# Altium PCB Logic.PcbDoc
Units mil, origin at the board's own origin, x right, y up, seen from the top; angles counter-clockwise.
Board outline 1060 x 1560 mil, 2 copper layers (Top Layer, Bottom Layer); 8 components, 10 nets, 51 pads, 1 vias.
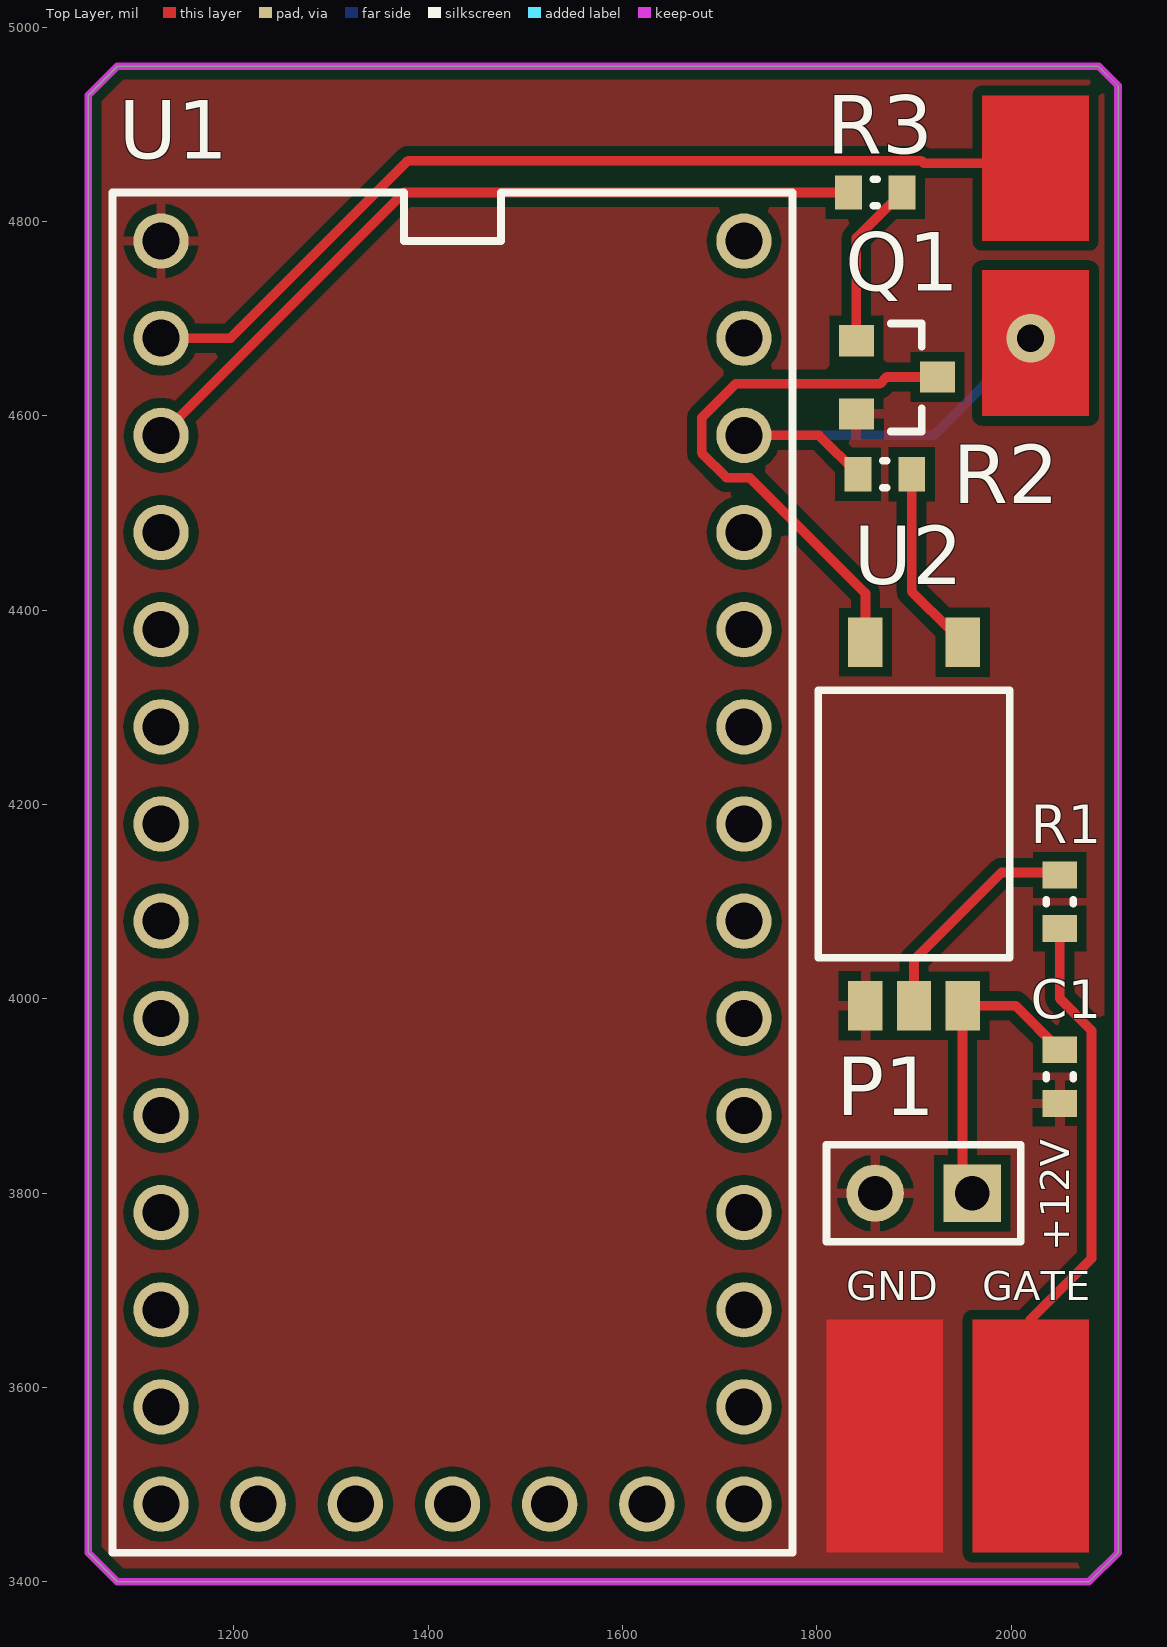
[diagram p0: Top Layer view]
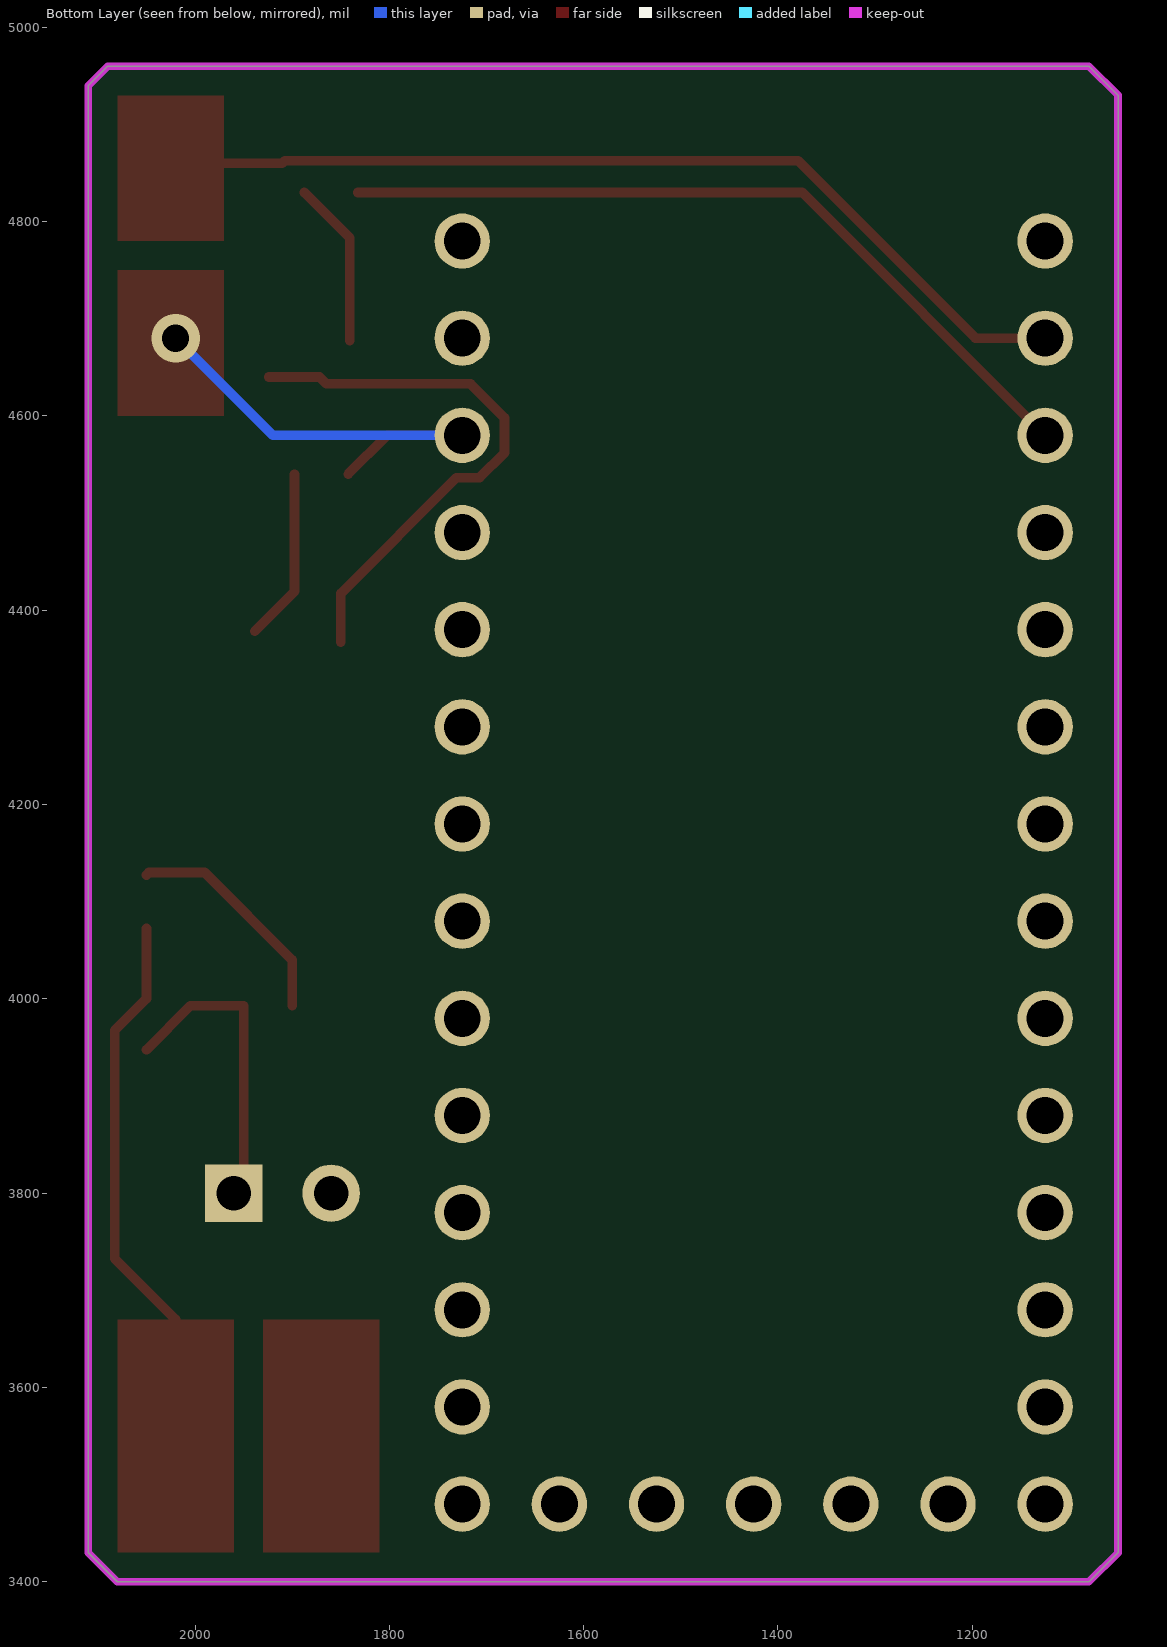
[diagram p1: Bottom Layer view, seen from below]

## Layer stack, top to bottom
Top Solder: solder mask 0.4, Solder Resist, Dk 3.5
Top Layer: signal copper 1.4
Dielectric 1: dielectric 12.6, FR-4, Dk 4.8
Bottom Layer: signal copper 1.4
Bottom Solder: solder mask 0.4, Solder Resist, Dk 3.5

## Board outline
1080,3400 1050,3430 1050,4930 1080,4960 2090,4960 2110,4940 2110,3430 2080,3400

## Design rules (kind name [scope] priority, off if disabled: settings)
Clearance [All] p1: gap=10
PolygonConnect [All] p1: connectstyle=Relief reliefconductorwidth=10 reliefentries=4 polygonreliefangle="90 Angle" airgapwidth=10
RoutingVias [All] p1: holewidth=28 width=50 viastyle="Through Hole" minholewidth=28 minwidth=50 maxholewidth=28 maxwidth=50
SolderMaskExpansion [All] p1: expansion=4
Width [All] p1: maxlimit=10 minlimit=10 preferedwidth=10
30 further rules are at their usual default settings.

## Components (designator, comment, footprint, x,y, rotation, side; value= is the part's Value field where it differs from the comment)
C1 "0.1uF" CAPC0603(1608)100_L 2050,3920 r90 top
P1 "" HDR1X2 1960,3800 r180 top
Q1 "MOSFET-N" SOT23-3 1880,4640 r270 top
R1 "100R" RESC0603(1608)_L 2050,4100 r90 top
R2 "150R" RESC0603(1608)_L 1870,4540 r180 top
R3 "100R" RESC0603(1608)_L 1860,4830 r180 top
U1 "" TEENSY_3.0_BASIC 1425,4130 r0 top
U2 "VOL3120" LSOP-5 1900,4180 r270 top

## Footprints (in the part's own frame and the unit in brackets; to place one, negate y for a bottom-side part, rotate by r counter-clockwise, add the part's x,y. Pads: shape width x height; smd on the part's side, far side on the other; paste and mask are expansions set on the pad)
CAPC0603(1608)100_L [mm] "Chip Capacitor, Body 1.6x0.8mm, Height 1.0mm, IPC High Density"
  rect 0.7x0.9 smd: 1(-0.7,0) 2(0.7,0)
  silkscreen extent -0.05,-0.35 0.05,0.35, body extent -0.87,-0.47 0.88,0.48, height 1
HDR1X2 [mm] "Connector; Header; 2 Position"
  rect 1.5x1.5 hole 0.9: 1(0,0)
  round 1.5 hole 0.9: 2(2.54,0)
  silkscreen extent -1.27,-1.27 3.81,1.27
LSOP-5 [mm]
  rect 1.3x0.9 smd: 1(-4.75,1.27) 2(-4.75,-1.27) 3(4.75,-1.27) 4(4.75,0) 5(4.75,1.27)
  silkscreen extent -3.5,-2.5 3.5,2.5
RESC0603(1608)_L [mm] "Chip Resistor, Body 1.6x0.8mm, IPC High Density"
  rect 0.7x0.9 smd: 1(-0.7,0) 2(0.7,0)
  silkscreen extent -0.05,-0.35 0.05,0.35, body extent -0.85,-0.47 0.85,0.47, height 0.6
SOT23-3 [mil]
  rect 32x36 smd: 1(-37.4,-39.37) 2(0,44) 3(38,-39.37)
  silkscreen extent -55,-4 56,28
TEENSY_3.0_BASIC [mil]
  round 57 hole 38: 0(-300,550) 1(-300,450) 2(-300,350) 3(-300,250) 3.3V(300,450) 3.3V1(-100,-650) 4(-300,150) 5(-300,50) 6(-300,-50) 7(-300,-150) 8(-300,-250) 9(-300,-350) 10(-300,-450) 11(-300,-550) 12(-300,-650) 13(300,-650) 14/A0(300,-550) 15/A1(300,-450) 16/A2(300,-350) 17/A3(300,-250) 18/A4(300,-150) 19/A5(300,-50) 20/A6(300,50) 21/A7(300,150) 22/A8(300,250) 23/A9(300,350) AGND(300,550) GND(-300,650) GND1(0,-650) PGM(100,-650) RESET(200,-650) VBAT(-200,-650) VIN(300,650)
  silkscreen extent -350,-700 350,700

## Part data
C1: library part CMP-1035-02595-1, "CAP 100nF 100V ±10% 0603 (1608 Metric) Thickness 1mm SMD"
P1: library part "Header 2", "Header, 2-Pin"
Q1: "N-Channel MOSFET"
R1 R3: library part CMP-1012-00050-1, "100R 0.1W 5% 0603 (1608 Metric)  SMD"
R2: library part CMP-1012-00054-1, "150R 0.1W 5% 0603 (1608 Metric)  SMD"
U1: library part TEENSY_3.0_BASIC

## Via types
v1: diameter 50, hole 28, Top Layer to Bottom Layer, 1 vias

## Nets (pads, with @x,y where several pads share a name; then routed paths per layer and width w, separated by ;. In a path a pad name is that pad's centre, name@x,y a point inside that pad or via, vN(x,y) a via of type N, cw(c..) or ccw(c..) an arc to the next point about the centre after c; other vN are vias at no path point)
+12V: C1.2 P1.1 U2.5 | length 316
  Top Layer w10: P1.1 1950,3810 U2.5 2004.57,3992.99 C1.2
GATE: R1.1 | length 562
  Top Layer w10: 2020,3550 2020,3670 2082.72,3732.72 2082.72,3967.55 2050,4000.27 R1.1
GND: C1.1 P1.2 Q1.3 U1.GND U2.3
NetQ1_1: Q1.1 R3.1 | length 172
  Top Layer w10: Q1.1 1840.63,4783.07 R3.1
NetQ1_2: Q1.2 U2.2 | length 574.7
  Top Layer w10: U2.2 1850,4417.39 1730.89,4536.5 1706.98,4536.5 1681.5,4561.98 1681.5,4598.02 1716.48,4633 1864.84,4633 1871.84,4640 Q1.2
NetR1_2: R1.2 U2.4 | length 235.3
  Top Layer w10: U2.4 1900,4040 1990,4130 2047.56,4130 R1.2
NetR2_1: R2.1 U2.1 | length 178.5
  Top Layer w10: R2.1 1897.56,4419.45 U2.1@1938.5,4378.5
NetR2_2: R2.2 U1.3.3V | length 470.4
  Top Layer w10: U1.3.3V 1802.44,4580 R2.2
  Bottom Layer w10: U1.3.3V 1920,4580 v1(2020,4680)
NetR3_2: R3.2 U1.1 | length 811
  Top Layer w10: U1.1 1375,4830 R3.2
TRIGGER: U1.0 | length 971.8
  Top Layer w10: U1.0 1196.72,4680 1379.43,4862.72 1907.55,4862.72 1910.27,4860 2020,4860
pads on no net: U1.2 U1.3 U1.3.3V1 U1.4 U1.5 U1.6 U1.7 U1.8 U1.9 U1.10 U1.11 U1.12 U1.13 U1.14/A0 U1.15/A1 U1.16/A2 U1.17/A3 U1.18/A4 U1.19/A5 U1.20/A6 U1.21/A7 U1.22/A8 U1.23/A9 U1.AGND U1.GND1 U1.PGM U1.RESET U1.VBAT U1.VIN

## Polygon pours and split planes (outlines as drawn)
GND on Top Layer "GND_L01_P000" (solid, remove dead copper, pour order 0): 980,5020 2200,5020 2200,3320 980,3320

## Keep-outs
Keep-Out Layer:
  the board outline again, w7.87

## Other copper
Top Layer:
  rectangle net TRIGGER: 1970,4780 2080,4930
  rectangle net NetR2_2: 1970,4600 2080,4750
  rectangle net GATE: 1960,3430 2080,3670
  rectangle net GND: 1810,3430 1930,3670

## Silkscreen, mask and mechanical layers (free items; w line width, h text height)
Top Overlay:
  text "+12V" at 2060,3740 h30 r90
  text "GND" at 1830,3690 h30
  text "GATE" at 1970,3690 h30